# Altium PCB PCB1.PcbDoc
Units mil, origin at the board's own origin, x right, y up, seen from the top; angles counter-clockwise.
Board outline 6000 x 4000 mil, 2 copper layers (Top Layer, Bottom Layer); 16 components, 85 nets, 144 pads, 0 vias.
Unrouted connection lines stored in the file: 65.
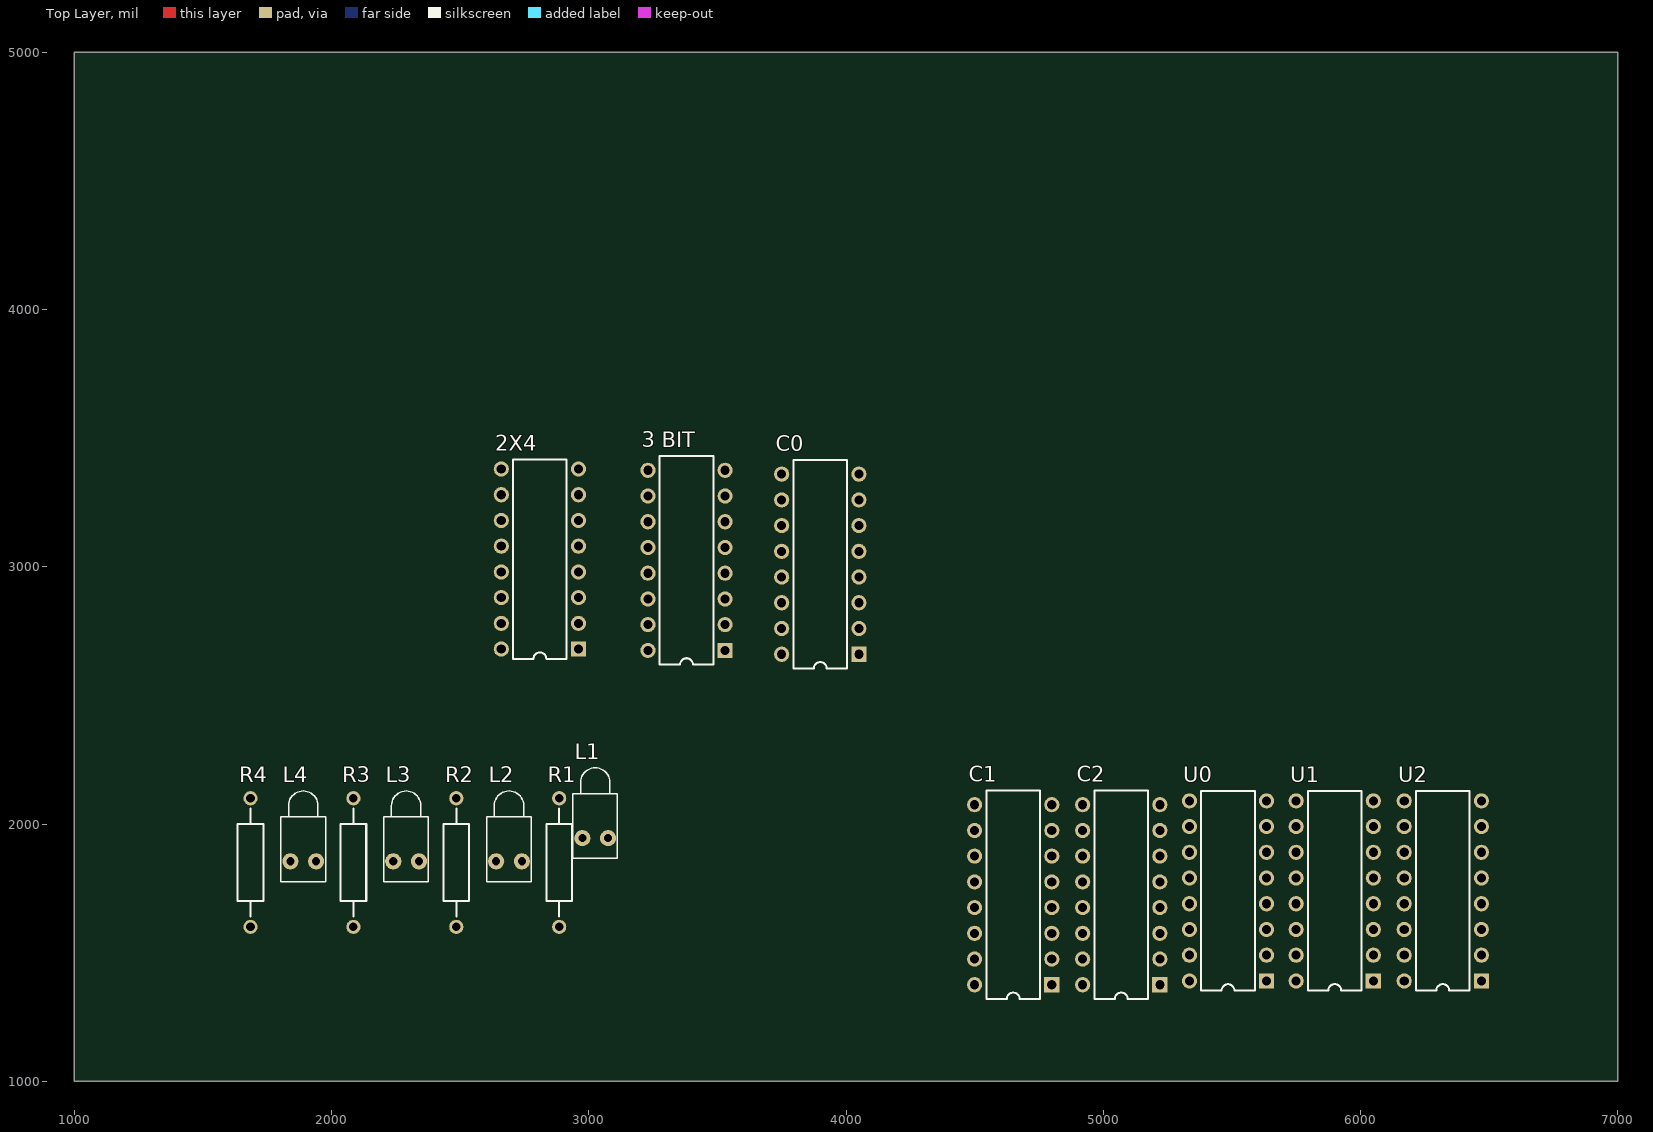
[diagram p0: Top Layer view]
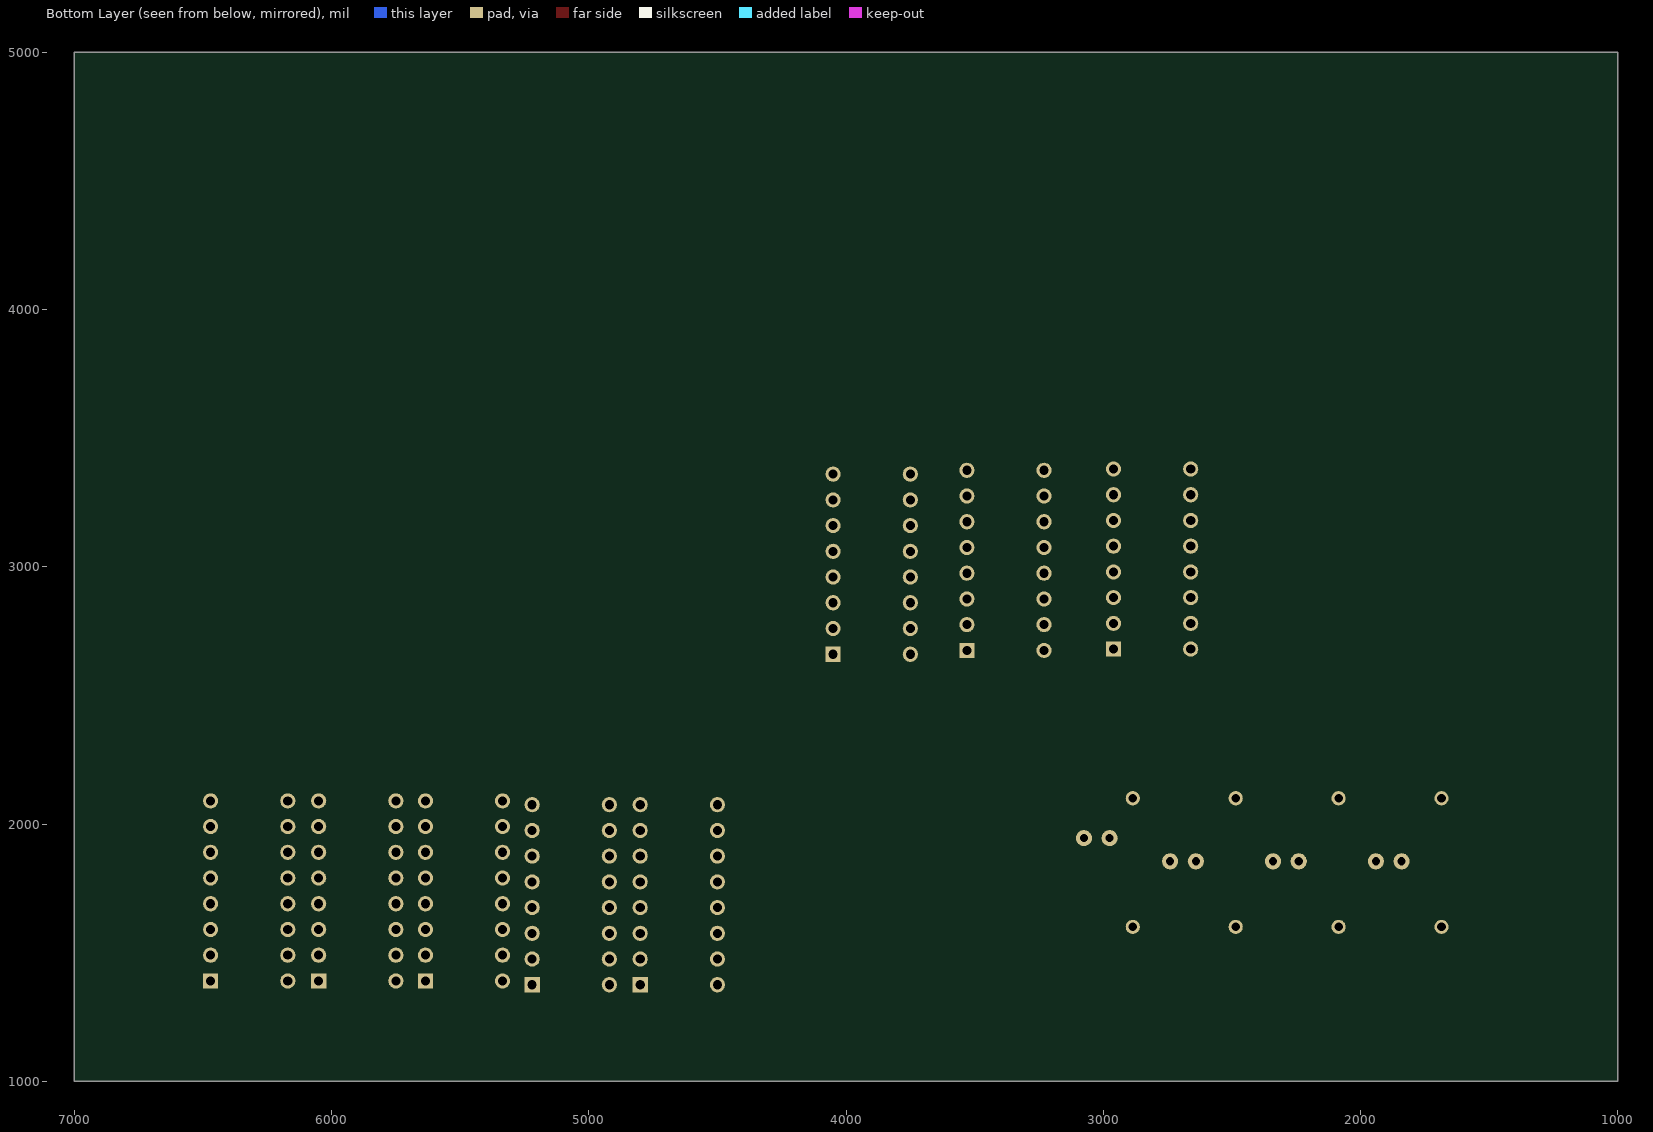
[diagram p1: Bottom Layer view, seen from below]

## Layer stack, top to bottom
Top Solder: solder mask 0.4, Solder Resist, Dk 3.5
Top Layer: signal copper 1.4
Dielectric 1: dielectric 12.6, FR-4, Dk 4.8
Bottom Layer: signal copper 1.4
Bottom Solder: solder mask 0.4, Solder Resist, Dk 3.5

## Board outline
1000,1000 7000,1000 7000,5000 1000,5000

## Design rules (kind name [scope] priority, off if disabled: settings)
Clearance [All] p1: gap=10 ignorepadtopadclearanceinfootprint=FALSE except(0: Arc-Hole Track-Hole SMDPad-Hole THPad-Hole Via-Hole Fill-Hole Poly-Hole Region-Hole Text-Hole)
PolygonConnect [All] p1: connectstyle=Relief reliefconductorwidth=10 reliefentries=4 polygonreliefangle="90 Angle" airgapwidth=10
RoomDefinition "Copy of PROJECT[1636]" [InComponentClass('Copy of PROJECT[1636]')] p1: confinementstyle=ConfineIn formatcopy=TRUE lockcomponents=FALSE outline 1625,1310 6510,1310 6510,2240 1625,2240
RoutingVias [All] p1: holewidth=28 width=50 viastyle="Through Hole" minholewidth=28 minwidth=50 maxholewidth=28 maxwidth=50
SolderMaskExpansion [All] p1: expansion=4 istentingtop=FALSE
Width [All] p1: maxlimit=10 minlimit=10 preferedwidth=10
30 further rules are at their usual default settings.

## Components (designator, comment, footprint, x,y, rotation, side; value= is the part's Value field where it differs from the comment)
2X4 "SN74AHC138N" N016 2810,3030 r90 top
"3 BIT" "SN54ALS190J" J016 3380,3025 r90 top
C0 "SN54ALS190J" J016 3900,3010 r90 top
C1 "SN54ALS190J" J016 4650,1725 r90 top
C2 "SN54ALS190J" J016 5070,1725 r90 top
L1 "LED1" LED-1 3025,1945 r90 top
L2 "LED1" LED-1 2690,1855 r90 top
L3 "LED1" LED-1 2290,1855 r90 top
L4 "LED1" LED-1 1890,1855 r90 top
R1 "Res Semi" AXIAL-0.5 2885,1850 r90 top value=1K
R2 "Res Semi" AXIAL-0.5 2485,1850 r90 top value=1K
R3 "Res Semi" AXIAL-0.5 2085,1850 r90 top value=1K
R4 "Res Semi" AXIAL-0.5 1685,1850 r90 top value=1K
U0 "SN74HC85AN" N016C 5485,1740 r90 top
U1 "SN74HC85AN" N016C 5900,1740 r90 top
U2 "SN74HC85AN" N016C 6320,1740 r90 top

## Footprints (in the part's own frame and the unit in brackets; to place one, negate y for a bottom-side part, rotate by r counter-clockwise, add the part's x,y. Pads: shape width x height; smd on the part's side, far side on the other; paste and mask are expansions set on the pad)
AXIAL-0.5 [mm] "Axial Device, Thru-Hole; 2 Leads; 0.5 in Pin Spacing"
  round 1.4 hole 0.85: 1(-6.35,0) 2(6.35,0)
  silkscreen extent -5.33,-1.27 5.33,1.27
J016 [mm] "DIP; 16 Leads; Row Spacing 7.62 mm; Pitch 2.54 mm"
  rect 1.5x1.5 hole 0.9: 1(-8.89,-3.81)
  round 1.5 hole 0.9: 2(-6.35,-3.81) 3(-3.81,-3.81) 4(-1.27,-3.81) 5(1.27,-3.81) 6(3.81,-3.81) 7(6.35,-3.81) 8(8.89,-3.81) 9(8.89,3.81) 10(6.35,3.81) 11(3.81,3.81) 12(1.27,3.81) 13(-1.27,3.81) 14(-3.81,3.81) 15(-6.35,3.81) 16(-8.89,3.81)
  silkscreen extent -10.3,-2.65 10.3,2.65
LED-1 [mm] "LED; 2 Leads"
  round 1.6 hole 0.8: 1(0,1.27) 2(0,-1.27)
  silkscreen extent -2,-2.2 6.95,2.2
N016 [mm] "DIP; 16 Leads; Row Spacing 7.62 mm; Pitch 2.54 mm"
  rect 1.5x1.5 hole 0.9: 1(-8.89,-3.81)
  round 1.5 hole 0.9: 2(-6.35,-3.81) 3(-3.81,-3.81) 4(-1.27,-3.81) 5(1.27,-3.81) 6(3.81,-3.81) 7(6.35,-3.81) 8(8.89,-3.81) 9(8.89,3.81) 10(6.35,3.81) 11(3.81,3.81) 12(1.27,3.81) 13(-1.27,3.81) 14(-3.81,3.81) 15(-6.35,3.81) 16(-8.89,3.81)
  silkscreen extent -9.85,-2.65 9.85,2.65
N016C [mm] "DIP; 16 Leads; Row Spacing 7.62 mm; Pitch 2.54 mm"
  rect 1.5x1.5 hole 0.9: 1(-8.89,-3.81)
  round 1.5 hole 0.9: 2(-6.35,-3.81) 3(-3.81,-3.81) 4(-1.27,-3.81) 5(1.27,-3.81) 6(3.81,-3.81) 7(6.35,-3.81) 8(8.89,-3.81) 9(8.89,3.81) 10(6.35,3.81) 11(3.81,3.81) 12(1.27,3.81) 13(-1.27,3.81) 14(-3.81,3.81) 15(-6.35,3.81) 16(-8.89,3.81)
  silkscreen extent -9.85,-2.65 9.85,2.65

## Part data
2X4: "3-Line to 8-Line Decoder / Demultiplexer", Code_JEDEC=MS-001-BB, ComponentLink1Description="Manufacturer Link", ComponentLink1URL=http://www.ti.com/, ComponentLink2Description=Datasheet, ComponentLink2URL=http://www-s.ti.com/sc/ds/sn74ahc138.pdf, DatasheetVersion=Jul-1998, LatestRevisionDate=04-Mar-2005, LatestRevisionNote="Stylized 3D Model Added.", PackageDescription="DIP; 16 Leads; Row Spacing 7.62 mm; Pitch 2.54 mm", PackageReference=N016, PackageVersion=Oct-1995, Published=8-Jun-2000, Publisher="Altium Limited"
"3 BIT" C0 C1 C2: "Synchronous 4-Bit Up/Down Decade and Binary Counter", ComponentLink1Description="Manufacturer Link", ComponentLink1URL=http://www.ti.com/, DatasheetVersion=May-1986, LatestRevisionDate=04-Mar-2005, LatestRevisionNote="Stylized 3D Model Added.", PackageDescription="DIP; 16 Leads; Row Spacing 7.62 mm; Pitch 2.54 mm", PackageReference=J016, PackageVersion=Jun-1999, Published=8-Jun-2000, Publisher="Altium Limited"
L1 L2 L3 L4: "Typical RED GaAs LED", LatestRevisionDate=08-Jul-2005, LatestRevisionNote="Mech Layer 1 removed.", PackageReference=LED-1, Published=8-Jun-2000, Publisher="Altium Limited"
R1 R2 R3 R4: "Semiconductor Resistor", LatestRevisionDate=17-Jul-2002, LatestRevisionNote="Re-released for DXP Platform.", PackageReference=AXIAL-0.5, Published=8-Jun-2000, Publisher="Altium Limited"
U0 U1 U2: "4-Bit Magnitude Comparator", Code_JEDEC=MS-001-BB, ComponentAvailability=Obsolete, ComponentLink1Description="Manufacturer Link", ComponentLink1URL=http://www.ti.com/, ComponentLink2Description="Discontinuation Notice", ComponentLink2URL=http://focus.ti.com/docs/prod/folders/print/sn74hc85a.html, DatasheetVersion=Jun-1989, LatestRevisionDate=04-Mar-2005, LatestRevisionNote="Stylized 3D Model Added.", PackageDescription="DIP; 16 Leads; Row Spacing 7.62 mm; Pitch 2.54 mm", PackageReference=N016C, PackageVersion=Oct-1995, Published=8-Jun-2000, Publisher="Altium Limited"

## Nets (pads, with @x,y where several pads share a name; then routed paths per layer and width w, separated by ;. In a path a pad name is that pad's centre, name@x,y a point inside that pad or via, vN(x,y) a via of type N, cw(c..) or ccw(c..) an arc to the next point about the centre after c; other vN are vias at no path point)
GND: 2X4.8 "3 BIT.8" C0.4 C0.8 C1.4 C1.8 C2.4 C2.8 L1.2 L2.2 L3.2 L4.2 U0.8 U1.8 U2.8
Net2X4_9: 2X4.9
Net2X4_10: 2X4.10
Net2X4_11: 2X4.11
Net2X4_13: 2X4.13
Net2X4_14: 2X4.14
"Net3 BIT_2": "3 BIT.2"
"Net3 BIT_3": "3 BIT.3"
"Net3 BIT_4": "3 BIT.4" U2.6
"Net3 BIT_5": "3 BIT.5" C0.5 C1.5 C2.5 U2.5
"Net3 BIT_6": "3 BIT.6"
"Net3 BIT_14": "3 BIT.14"
"Net3I OR 1_1": 
"Net3I OR 1_2": 
"Net3I OR 1_8": 
"Net3I OR 1_9": R1.1
"Net3I OR_1": 
"Net3I OR_2": 
"Net3I OR_3": 
"Net3I OR_4": 
"Net3I OR_5": 
"Net3I OR_6": R3.1
"Net3I OR_8": 
"Net3I OR_9": R4.1
"Net3I OR_10": R2.1
"Net3I OR_11": 
"Net3I OR_12": 
"Net3I OR_13": 
"NetAND 1_1": 
"NetAND 1_2": 
"NetAND 1_3": 
"NetAND 1_6": 
"NetAND 1_8": 
"NetAND 1_11": 
"NetAND 3_1": 
"NetAND 3_9": 
"NetAND 4_3": 
"NetAND 4_6": 
"NetAND 4_8": 
"NetAND 4_11": 
NetAND_1: 
NetAND_4: 
NetAND_9: 
NetAND_12: 
NetC0_1: C0.1 C0.2 U0.11
NetC0_3: C0.3 C0.15 U0.9
NetC0_6: C0.6 C0.10 U0.14
NetC0_7: C0.7 C0.9 U0.1
NetC0_11: C0.11 C1.11 C2.11
NetC0_12: C0.12 C1.14
NetC0_14: C0.14
NetC1_1: C1.1 C1.2 U1.11
NetC1_3: C1.3 C1.15 U1.9
NetC1_6: C1.6 C1.10 U1.14
NetC1_7: C1.7 C1.9 U1.1
NetC1_12: C1.12 C2.14
NetC2_1: C2.1 C2.2 U2.11
NetC2_3: C2.3 C2.15 U2.9
NetC2_6: C2.6 C2.10 U2.14
NetC2_7: C2.7 C2.9 U2.1
NetL1_1: L1.1 R1.2
NetL2_1: L2.1 R2.2
NetL3_1: L3.1 R3.2
NetL4_1: L4.1 R4.2
"NetQ IN_1": 
"NetQ IN_2": 
NetS0_2: U0.10
NetS1_2: U0.12
NetS2_2: U0.13
NetS3_2: U0.15
NetS4_2: U1.10
NetS5_2: U1.12
NetS6_2: U1.13
NetS7_2: U1.15
NetS8_2: U2.10
NetS9_2: U2.12
NetS10_2: U2.13
NetS11_2: U2.15
NetU0_5: U0.5 U1.4
NetU0_6: U0.6 U1.3
NetU0_7: U0.7 U1.2
NetU1_5: U1.5 U2.4
NetU1_6: U1.6 U2.3
NetU1_7: U1.7 U2.2
VCC: 2X4.16 "3 BIT.11" "3 BIT.16" C0.16 C1.16 C2.16 U0.16 U1.16 U2.16
pads on no net: 2X4.1 2X4.2 2X4.3 2X4.4 2X4.5 2X4.6 2X4.7 2X4.12 2X4.15 "3 BIT.1" "3 BIT.7" "3 BIT.9" "3 BIT.10" "3 BIT.12" "3 BIT.13" "3 BIT.15" C0.13 C1.13 C2.12 C2.13 U0.2 U0.3 U0.4 U2.7